# Altium PCB main.PcbDoc
Units mil, origin at the board's own origin, x right, y up, seen from the top; angles counter-clockwise.
Board outline 2000 x 8000 mil, 2 copper layers (Top Layer, Bottom Layer); 14 components, 21 nets, 67 pads, 4 vias.
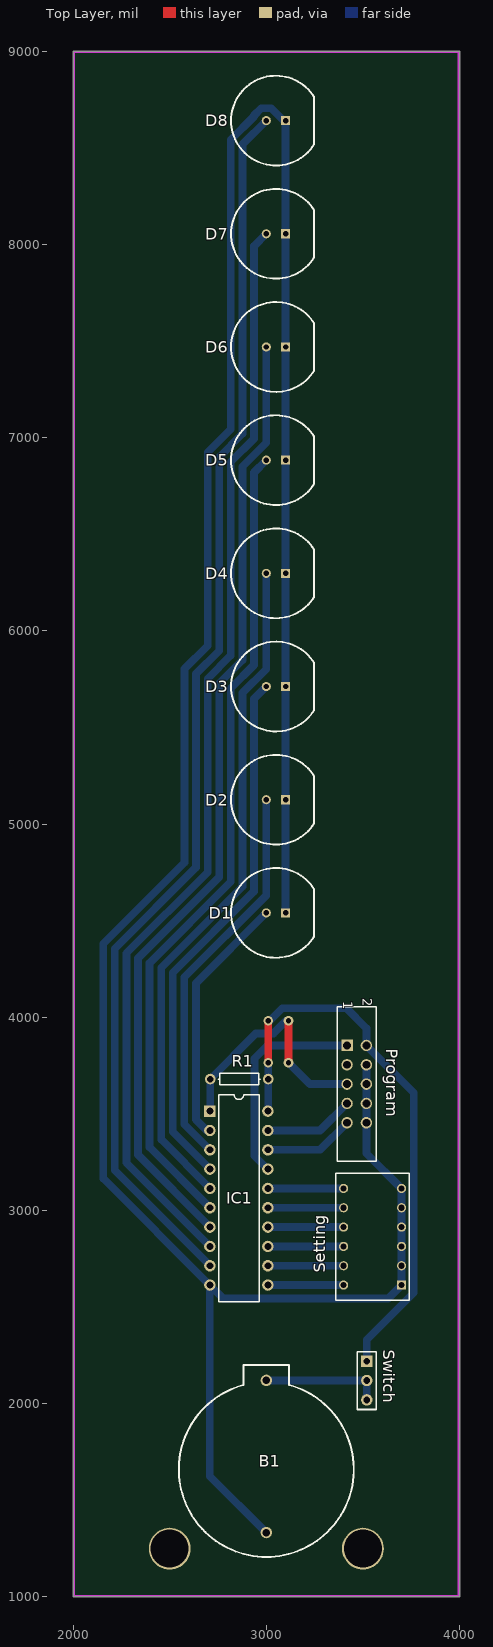
[diagram p0: Top Layer view]
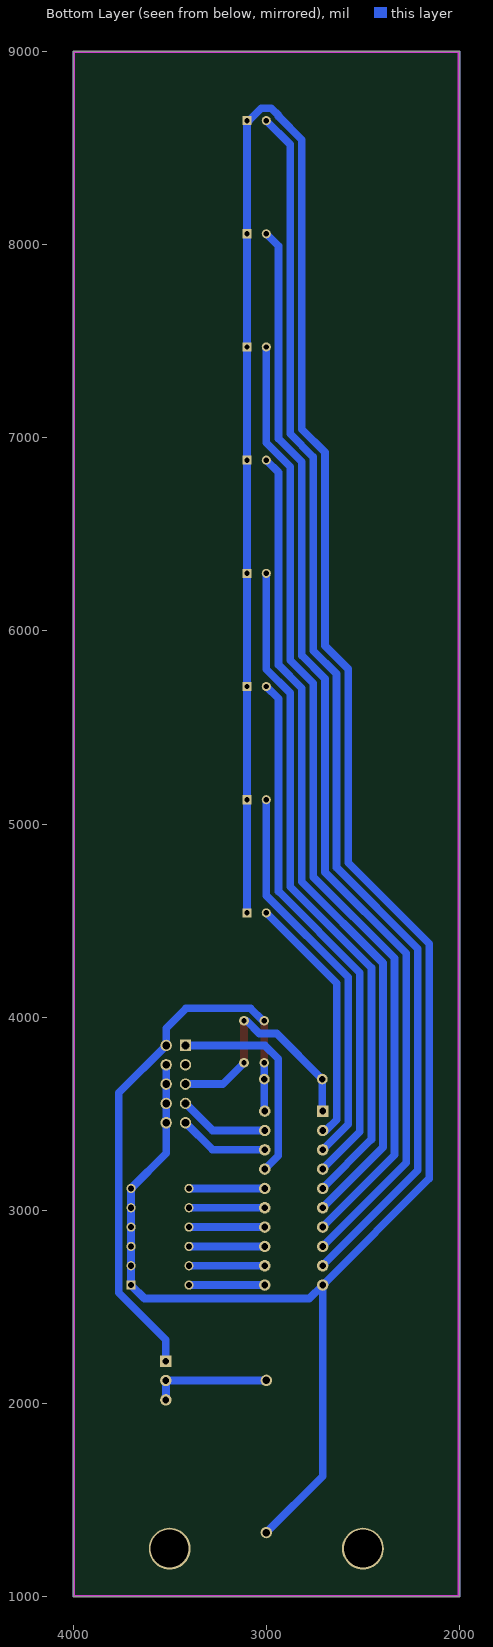
[diagram p1: Bottom Layer view, seen from below]

## Layer stack, top to bottom
Top Layer: signal copper 1.4
Dielectric: dielectric 12.6, FR-4, Dk 4.8
Bottom Layer: signal copper 1.4

## Board outline
2000,1000 4000,1000 4000,9000 2000,9000

## Design rules (kind name [scope] priority, off if disabled: settings)
Clearance KeepOut [(OnLayer('Keep-Out Layer')) vs (OnLayer('Bottom Layer'))] p1: gap=10
Clearance [All] p2: gap=20
HoleSize [All] p1: absolutevalues=TRUE maxlimit=393.7 minlimit=1 maxpercent=80.000 minpercent=20.000
PolygonConnect [All] p1: connectstyle=Relief reliefconductorwidth=10 reliefentries=4 polygonreliefangle="90 Angle"
RoomDefinition main [InComponentClass('main')] p1: confinementstyle=ConfineIn formatcopy=TRUE lockcomponents=FALSE outline 2000,9000 4000,9000 4000,1000 2000,1000
RoutingLayers [All] p1: top layer_v5=FALSE bottom layer_v5=TRUE
RoutingVias [All] p1: holewidth=27.56 width=50 viastyle="Through Hole" minholewidth=27.56 minwidth=50 maxholewidth=27.56 maxwidth=50
SilkToSilkClearance [All] p1: silktosilkclearance=1
SilkscreenOverComponentPads [All] p1: minsilkscreentomaskgap=1
SolderMaskExpansion [All] p1: expansion=4
Width [All] p1: maxlimit=80 minlimit=40 preferedwidth=40
24 further rules are at their usual default settings.

## Classes and differential pairs
net class D[1..8]: D1 D2 D3 D4 D5 D6 D7 D8

## Components (designator, comment, footprint, x,y, rotation, side; value= is the part's Value field where it differs from the comment)
B1 "Battery Holder" "BATTERY HOLDER" 3000,1660 r90 top
D1 "LED1" LED5MM 3000,4540 r0 top
D2 "LED1" LED5MM 3000,5125.71 r0 top
D3 "LED1" LED5MM 3000,5711.43 r0 top
D4 "LED1" LED5MM 3000,6297.14 r0 top
D5 "LED1" LED5MM 3000,6882.86 r0 top
D6 "LED1" LED5MM 3000,7468.57 r0 top
D7 "LED1" LED5MM 3000,8054.29 r0 top
D8 "LED1" LED5MM 3000,8640 r0 top
IC1 "ATTiny2313V" 20P3 2858,3064 r270 top
Program "Header 5X2" BOX2X5 3418,3854 r270 top
R1 "Res1" AXIAL-0.3 2860,3680 r180 top
Setting "Header 6X2" DIP6SWITCH 3700,2614 r180 top
Switch "Header 3" HDR1X3 3520,2220 r270 top

## Footprints (in the part's own frame and the unit in brackets; to place one, negate y for a bottom-side part, rotate by r counter-clockwise, add the part's x,y. Pads: shape width x height; smd on the part's side, far side on the other; paste and mask are expansions set on the pad)
20P3 [mm] "DIP; 20 Leads; Row Spacing 7.62 mm; Pitch 2.54 mm"
  rect 1.5x1.5 hole 0.9: 1(-11.43,-3.81)
  round 1.5 hole 0.9: 2(-8.89,-3.81) 3(-6.35,-3.81) 4(-3.81,-3.81) 5(-1.27,-3.81) 6(1.27,-3.81) 7(3.81,-3.81) 8(6.35,-3.81) 9(8.89,-3.81) 10(11.43,-3.81) 11(11.43,3.81) 12(8.89,3.81) 13(6.35,3.81) 14(3.81,3.81) 15(1.27,3.81) 16(-1.27,3.81) 17(-3.81,3.81) 18(-6.35,3.81) 19(-8.89,3.81) 20(-11.43,3.81)
  silkscreen extent -13.6,-2.65 13.6,2.65
AXIAL-0.3 [mm] "Axial Device, Thru-Hole; 2 Leads; 0.3 in Pin Spacing"
  round 1.4 hole 0.85: 1(-3.81,0) 2(3.81,0)
  silkscreen extent -2.77,-0.76 2.77,0.76
"BATTERY HOLDER" [mm]
  round 1.5 hole 1: G(-8.3,0) V+(11.7,0)
  silkscreen extent -11.5,-11.5 13.75,11.5
BOX2X5 [mm] "Connector; Header; 5x2 Position"
  rect 1.5x1.5 hole 1.02: 1(0,0)
  round 1.5 hole 1.02: 2(0,2.54) 3(2.54,0) 4(2.54,2.54) 5(5.08,0) 6(5.08,2.54) 7(7.62,0) 8(7.62,2.54) 9(10.16,0) 10(10.16,2.54)
  silkscreen extent -5.08,-1.27 15.24,3.81
DIP6SWITCH [mm]
  rect 1.2x1.2 hole 0.8: 1(0,0)
  round 1.2 hole 0.8: 2(7.62,0) 3(0,-2.54) 4(7.62,-2.54) 5(0,-5.08) 6(7.62,-5.08) 7(0,-7.62) 8(7.62,-7.62) 9(0,-10.16) 10(7.62,-10.16) 11(0,-12.7) 12(7.62,-12.7)
  silkscreen extent -1.04,-14.7 8.66,2
HDR1X3 [mm] "Connector; Header; 3 Position"
  rect 1.5x1.5 hole 0.9: 1(0,0)
  round 1.5 hole 0.9: 2(2.54,0) 3(5.08,0)
  silkscreen extent -1.27,-1.27 6.35,1.27
LED5MM [mm]
  round 1.2 hole 0.7: 1(0,0)
  rect 1.2x1.2 hole 0.7: 2(2.54,0)
  silkscreen extent -4.63,-5.9 6.27,5.9

## Part data
D1 D2 D3 D4 D5 D6 D7 D8: "Typical RED GaAs LED"
IC1: library part ATtiny2313V-PI, "8-Bit AVR Microcontroller with 2K Bytes of Flash Memory"
Program: "Header, 5-Pin, Dual row"
R1: "Resistor"
Setting: "Header, 6-Pin, Dual row"
Switch: "Header, 3-Pin"

## Free pads (board coordinates)
  round 216.54 hole 196.85: Hole(2500,1250) Hole(3500,1250)

## Via types
v1: diameter 50, hole 27.56, Top Layer to Bottom Layer, 4 vias

## Nets (pads, with @x,y where several pads share a name; then routed paths per layer and width w, separated by ;. In a path a pad name is that pad's centre, name@x,y a point inside that pad or via, vN(x,y) a via of type N, cw(c..) or ccw(c..) an arc to the next point about the centre after c; other vN are vias at no path point)
D1: D1.1 IC1.2 | length 1315.7
  Bottom Layer w40: IC1.2 2692.38,3414 2636,3470.38 2636,4176 D1.1
D2: D2.1 IC1.3 | length 2042.3
  Bottom Layer w40: IC1.3 2707.52,3314 2576,3445.52 2576,4205.98 3000,4629.98 D2.1
D3: D3.1 IC1.4 | length 2777.4
  Bottom Layer w40: IC1.4 2708,3215.67 2516,3407.67 2516,4230.83 2936.38,4651.21 2936.38,5647.81 D3.1
D4: D4.1 IC1.5 | length 3512.9
  Bottom Layer w40: IC1.5 2708,3115.67 2456,3367.67 2456,4255.68 2876.38,4676.06 2876.38,5677.78 3000,5801.4 D4.1
D5: D5.1 IC1.6 | length 4248.3
  Bottom Layer w40: IC1.6 2708,3015.67 2396,3327.67 2396,4280.53 2816.38,4700.91 2816.38,5702.63 2936.38,5822.63 2936.38,6819.23 D5.1
D6: D6.1 IC1.7 | length 4983.7
  Bottom Layer w40: IC1.7 2708,2915.67 2336,3287.67 2336,4305.39 2756.38,4725.76 2756.38,5727.49 2876.38,5847.49 2876.38,6849.21 3000,6972.83 D6.1
D7: D7.1 IC1.8 | length 5719.1
  Bottom Layer w40: IC1.8 2708,2815.67 2276,3247.67 2276,4330.24 2696.38,4750.62 2696.38,5752.34 2816.38,5872.34 2816.38,6874.06 2936.38,6994.06 2936.38,7990.66 D7.1
D8: D8.1 IC1.9 | length 6454.5
  Bottom Layer w40: IC1.9 2708,2715.67 2216,3207.67 2216,4355.09 2636.38,4775.47 2636.38,5777.19 2756.38,5897.19 2756.38,6898.92 2876.38,7018.92 2876.38,8516.38 D8.1
GND: B1.G D1.2 D2.2 D3.2 D4.2 D5.2 D6.2 D7.2 D8.2 IC1.10 Program.4 Program.6 Program.8 Program.10 Setting.1 Setting.3 Setting.5 Setting.7 Setting.9 Setting.11 | length 14576.4
  Bottom Layer w40: B1.G 2708,1625.23 IC1.10 ; D1.2 D8.2 3089.98,8640 3026.35,8703.62 2973.65,8703.62 2936.38,8666.35 2936.38,8661.23 2816.38,8541.23 2816.38,7043.77 2696.38,6923.77 2696.38,5922.04 2576.38,5802.04 2576.38,4800.32 2156,4379.94 2156,3166 IC1.10 ; Program.4 Program.6 Program.8 Program.10 3518,3296 Setting.11 Setting.9 Setting.7 Setting.5 Setting.3 Setting.1 3630.47,2544.47 2777.53,2544.47 IC1.10
MISO: IC1.18 Program.9 | length 468
  Bottom Layer w40: IC1.18 3278,3314 Program.9
MOSI: IC1.17 Program.1 | length 1109.8
  Bottom Layer w40: IC1.17@3008,3215.67 IC1.17 2938.47,3283.53 2938.47,3785.4 3007.08,3854 Program.1
NetB1_V+: B1.V+ Switch.2 Switch.3 | length 619.4
  Bottom Layer w40: B1.V+ 3519.37,2120.63 Switch.3@3519.37,2020.63
NetIC1_11: IC1.11 Setting.2 | length 392
  Bottom Layer w40: IC1.11 Setting.2
NetIC1_12: IC1.12 Setting.4 | length 392
  Bottom Layer w40: IC1.12 Setting.4
NetIC1_13: IC1.13 Setting.6 | length 392
  Bottom Layer w40: IC1.13 Setting.6
NetIC1_14: IC1.14 Setting.8 | length 392
  Bottom Layer w40: IC1.14 Setting.8
NetIC1_15: IC1.15 Setting.10 | length 392
  Bottom Layer w40: IC1.15 Setting.10
NetIC1_16: IC1.16 Setting.12 | length 392
  Bottom Layer w40: IC1.16 Setting.12
R\S\T\: IC1.1 Program.5 R1.2 | length 1258.7
  Top Layer w40: v1(3115,3765) v1(3115,3981)
  Bottom Layer w40: IC1.1@2710,3516 R1.2 2946,3916 3036.92,3916 3101.92,3981 v1(3115,3981) ; v1(3115,3765) 3226,3654 Program.5
SCK: IC1.19 Program.7 | length 468
  Bottom Layer w40: IC1.19 3278,3414 Program.7
VTG: IC1.20 Program.2 R1.1 Switch.1 | length 2969.9
  Top Layer w40: v1(3010,3765) v1(3010,3981)
  Bottom Layer w40: IC1.20@3010,3516 R1.1 v1(3010,3765) ; v1(3010,3981) 3017.07,3981 3082.07,4046 3415,4046 3518,3943 Program.2 ; Program.2@3518,3852.33 Program.2 ; Switch.1 3520,2330.19 3763.62,2573.81 3763.62,3608.38 Program.2
pads on no net: Program.3

## Polygon pours and split planes (outlines as drawn)
GND on Bottom Layer "Bottom Layer-No Net" (solid, remove dead copper, shelved, pour order 1000): 2000,9000 2000,1000 4000,1000 4000,9000

## Keep-outs
Keep-Out Layer:
  lines w10: 2005,1005 2005,8995 3995,8995 3995,1005 2005,1005

## Text inside footprints (layer, text, board x,y; h text height)
Program: Top Overlay "1" at 3398,4084 h50 r270; Top Overlay "2" at 3498,4099 h50 r270